# EAGLE board board04-12 (EAGLE 7.5.0)
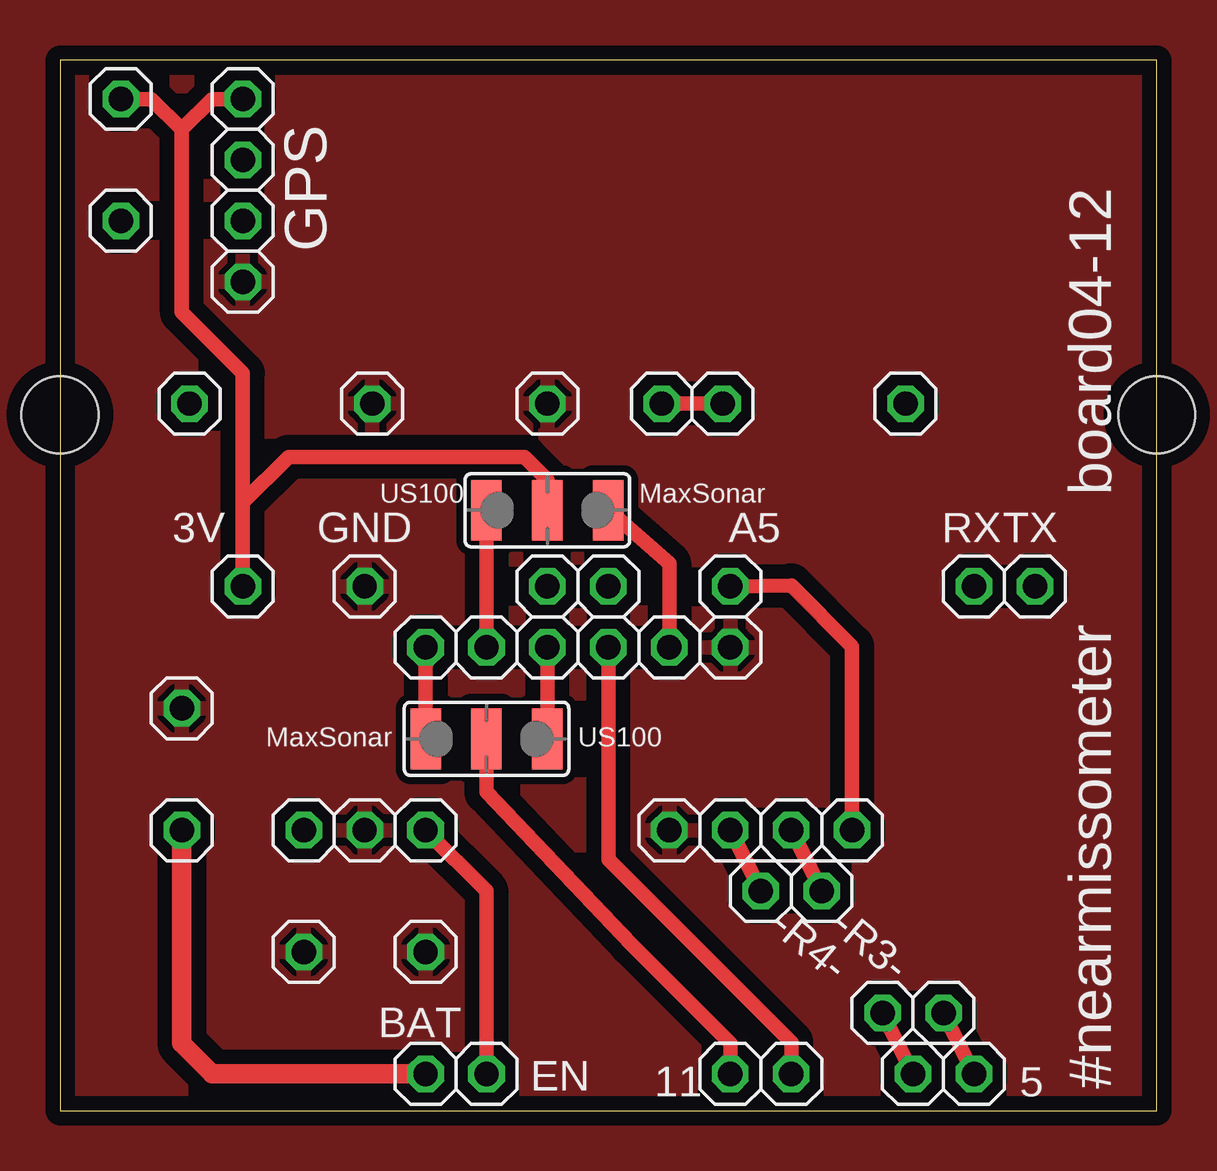
[diagram p0: board, top side]
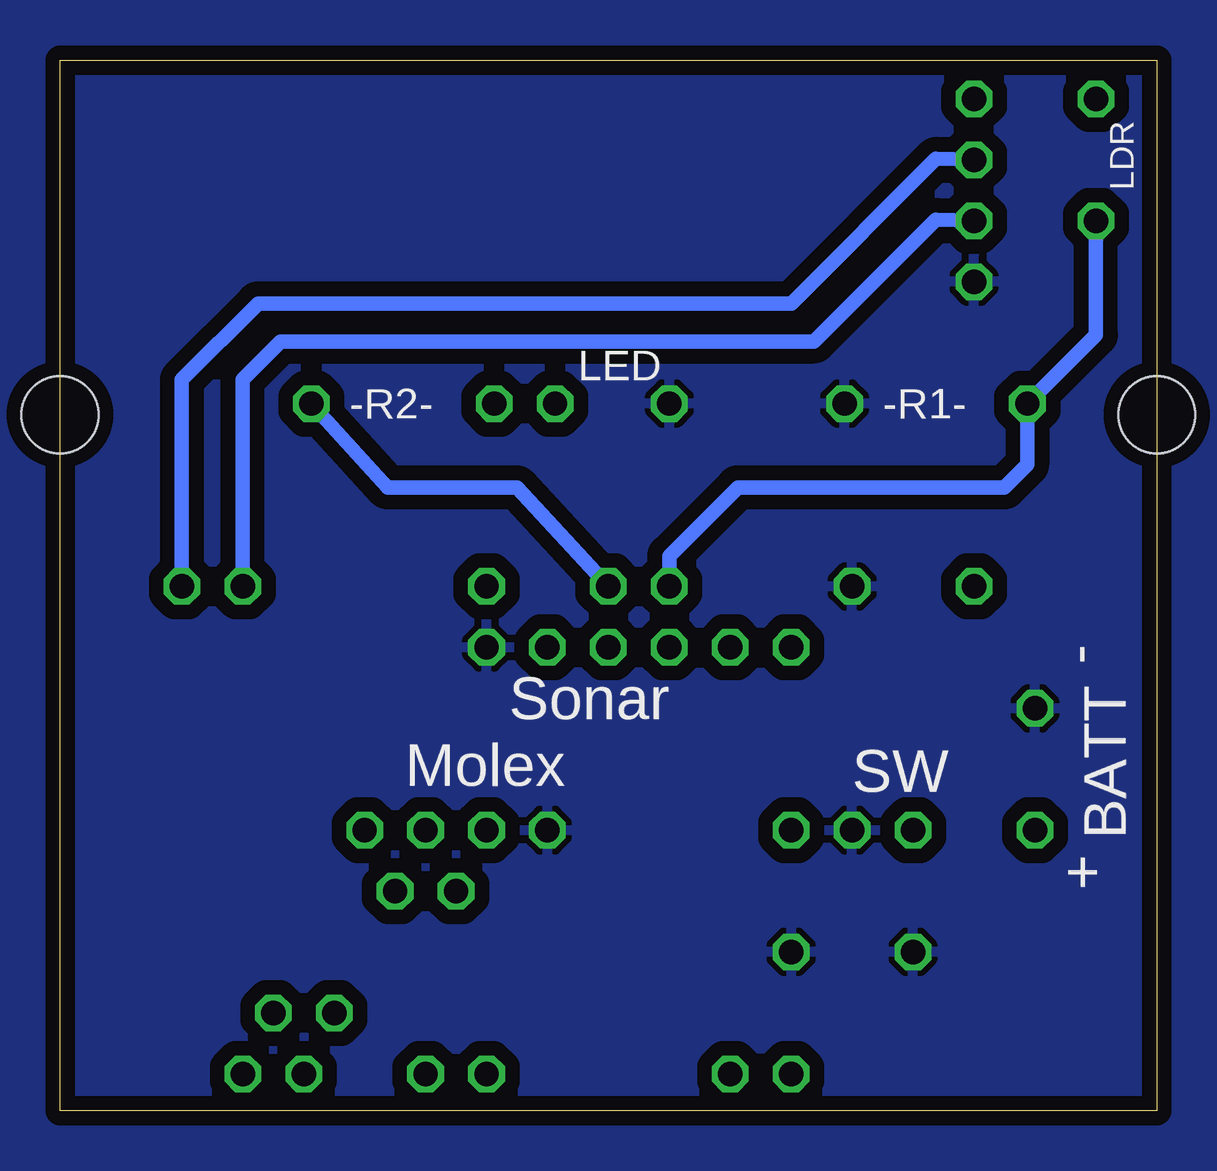
[diagram p1: board, bottom side, seen from below]

Size 45.72 x 43.8 mm. Coordinates in mm from the lower left corner, seen from the top.
Outline: 0,0 45.72,0 45.72,43.8 0,43.8 0,0
Copper layers (1*16): Top 0.0356mm / dielectric 1.5011mm / Bottom 0.0356mm
Design rules "LaenPCBOrder": minimum track width 6mil, minimum drill 13mil, track to track 6mil, track to pad 6mil, pad to pad 6mil, via to via 6mil, smd to smd 6mil, copper to edge 15mil, drill to drill 6mil, minimum pad ring 7mil, minimum via ring 7mil, stop-mask expansion 3mil, vias tented up to drill 0mil, thermal gap 10mil
Holes 3.2 mm at 0,29.02 45.72,29.02

## Footprints (pad centres in the part's own frame; a part is rotated, then mirrored left to right if it is on the bottom)
1X01 = drill 1.016 octagon: 1 0,0
SJ_2W = smd 1.27 x 2.54: 1 -2.54,0; 2 0,0; 3 2.54,0

## Placement (x,y rotation side)
3V  [1X01]  7.62,21.86 0 top
A1  [1X01]  31.75,9.16 0 top
A2  [1X01]  2.54,42.18 0 top
A3  [1X01]  35.24,29.48 0 top
A4  [1X01]  36.83,4.08 0 top
A5  [1X01]  27.94,21.86 0 top
A6  [1X01]  29.21,9.16 0 top
A7  [1X01]  34.29,4.08 0 top
A8  [1X01]  27.94,11.7 0 top
A9  [1X01]  25.4,11.7 0 top
A10  [1X01]  30.48,11.7 0 top
A11  [1X01]  33.02,11.7 0 top
A12  [1X01]  5.08,11.7 0 top
A13  [1X01]  10.16,11.7 0 top
A14  [1X01]  12.7,11.7 0 top
A15  [1X01]  15.24,11.7 0 top
A16  [1X01]  5.08,16.78 0 top
A17  [1X01]  20.32,21.86 0 top
A18  [1X01]  22.86,21.86 0 top
A19  [1X01]  25.08,29.48 0 top
A20  [1X01]  27.62,29.48 0 top
A21  [1X01]  13.02,29.48 0 top
A22  [1X01]  20.32,29.48 0 top
A26  [1X01]  7.62,42.18 0 top
A27  [1X01]  7.62,39.64 0 top
A28  [1X01]  7.62,37.1 0 top
A29  [1X01]  7.62,34.56 0 top
A30  [1X01]  5.4,29.48 0 top
A31  [1X01]  2.54,37.1 0 top
BAT  [1X01]  15.24,1.54 0 top
EN  [1X01]  17.78,1.54 0 top
F05  [1X01]  38.1,1.54 0 top
F06  [1X01]  35.56,1.54 0 top
F10  [1X01]  30.48,1.54 0 top
F11  [1X01]  27.94,1.54 0 top
GND  [1X01]  12.7,21.86 0 top
JP1  [1X01]  10.16,6.62 0 top
JP2  [1X01]  15.24,6.62 0 top
M0  [1X01]  15.24,19.32 0 top
M1  [1X01]  17.78,19.32 0 top
M2  [1X01]  20.32,19.32 0 top
M3  [1X01]  22.86,19.32 0 top
M4  [1X01]  25.4,19.32 0 top
M6GND  [1X01]  27.94,19.32 0 top
RX  [1X01]  38.1,21.86 0 top
SJ1  [SJ_2W]  17.78,15.51 0 top
SJ2  [SJ_2W]  20.32,25.04 180 top
TX  [1X01]  40.64,21.86 0 top

## Library data of the parts
3V A1-A22 A26-A31 BAT EN F05 F06 F10 F11 GND JP1 JP2 M0 M1-M4 M6GND RX TX = pinhead
SJ1 SJ2 = jumper

## Nets
+3V3: 3V.1 A2.1 A26.1 SJ2.2
GND: A9.1 A14.1 A16.1 A21.1 A22.1 A29.1 GND.1 JP1.1 JP2.1 M6GND.1
N$1: A28.1 RX.1
N$2: A27.1 TX.1
N$3: A1.1 A10.1
N$4: A6.1 A8.1
N$5: A5.1 A11.1
N$6: A4.1 F05.1
N$7: F10.1 M3.1
N$8: F11.1 SJ1.2
N$9: A12.1 BAT.1
N$10: A15.1 EN.1
N$11: A7.1 F06.1
N$12: A19.1 A20.1
N$13: M0.1 SJ1.1
N$15: M4.1 SJ2.1
N$16: M1.1 SJ2.3
N$18: A17.1 A30.1 A31.1
N$19: A3.1 A18.1
N$20: M2.1 SJ1.3

## Tracks (layer width: path | path; a pad name or v marks a point on that pad's centre or on a via)
+3V3
  Top 0.61: 3V.1 7.62,25.35 | SJ2.2 20.32,26.3 19.37,27.26 9.53,27.26 7.62,25.35 | 7.62,25.35 7.62,30.75 5.08,33.29 5.08,40.91 | 5.08,40.91 3.81,42.18 A2.1 | A26.1 6.35,42.18 5.08,40.91
GND
  pour Bottom (isolate 0.61): -7.3,48.53 -7.3,-6.35 52.39,-6.67 51.75,48.53
  pour Top (isolate 0.61): -4.45,46.94 -4.45,-4.76 49.21,-4.49 48.9,47.26 14.92,46.94
N$1
  Bottom 0.61: RX.1 38.1,30.48 36.51,32.07 14.29,32.07 9.21,37.15 A28.1
N$2
  Bottom 0.61: A27.1 9.21,39.69 15.24,33.66 37.47,33.66 40.64,30.48 TX.1
N$3
  Top 0.61: A1.1 A10.1
N$4
  Top 0.61: A6.1 A8.1
N$5
  Top 0.61: A5.1 30.48,21.91 33.02,19.37 A11.1
N$6
  Top 0.61: F05.1 A4.1
N$7
  Top 0.61: F10.1 30.48,2.86 22.86,10.48 M3.1
N$8
  Top 0.61: SJ1.2 17.78,13.29 23.81,6.94 27.94,2.81 F11.1
N$9
  Top 0.813: A12.1 5.08,2.81 6.35,1.54 BAT.1
N$10
  Top 0.61: A15.1 17.78,9.16 EN.1
N$11
  Top 0.61: A7.1 F06.1
N$12
  Top 0.61: A20.1 A19.1
N$13
  Top 0.61: M0.1 SJ1.1
N$15
  Top 0.61: SJ2.1 25.4,22.81 M4.1
N$16
  Top 0.61: SJ2.3 M1.1
N$18
  Bottom 0.61: A17.1 20.32,23.13 17.46,25.99 6.35,25.99 5.4,26.94 A30.1 2.54,32.34 A31.1
N$19
  Bottom 0.61: A18.1 26.67,25.99 32.07,25.99 A3.1
N$20
  Top 0.61: SJ1.3 M2.1

## Text on the board
tNames: GPS | board04-12 | US100 | MaxSonar | MaxSonar | US100 | -R4- | -R3- | 11 | 5 | #nearmissometer
bNames: LDR | LED | -R1- | -R2- | - | Sonar | Molex | SW | BATT | +